# EAGLE board node (EAGLE 9.3.0)
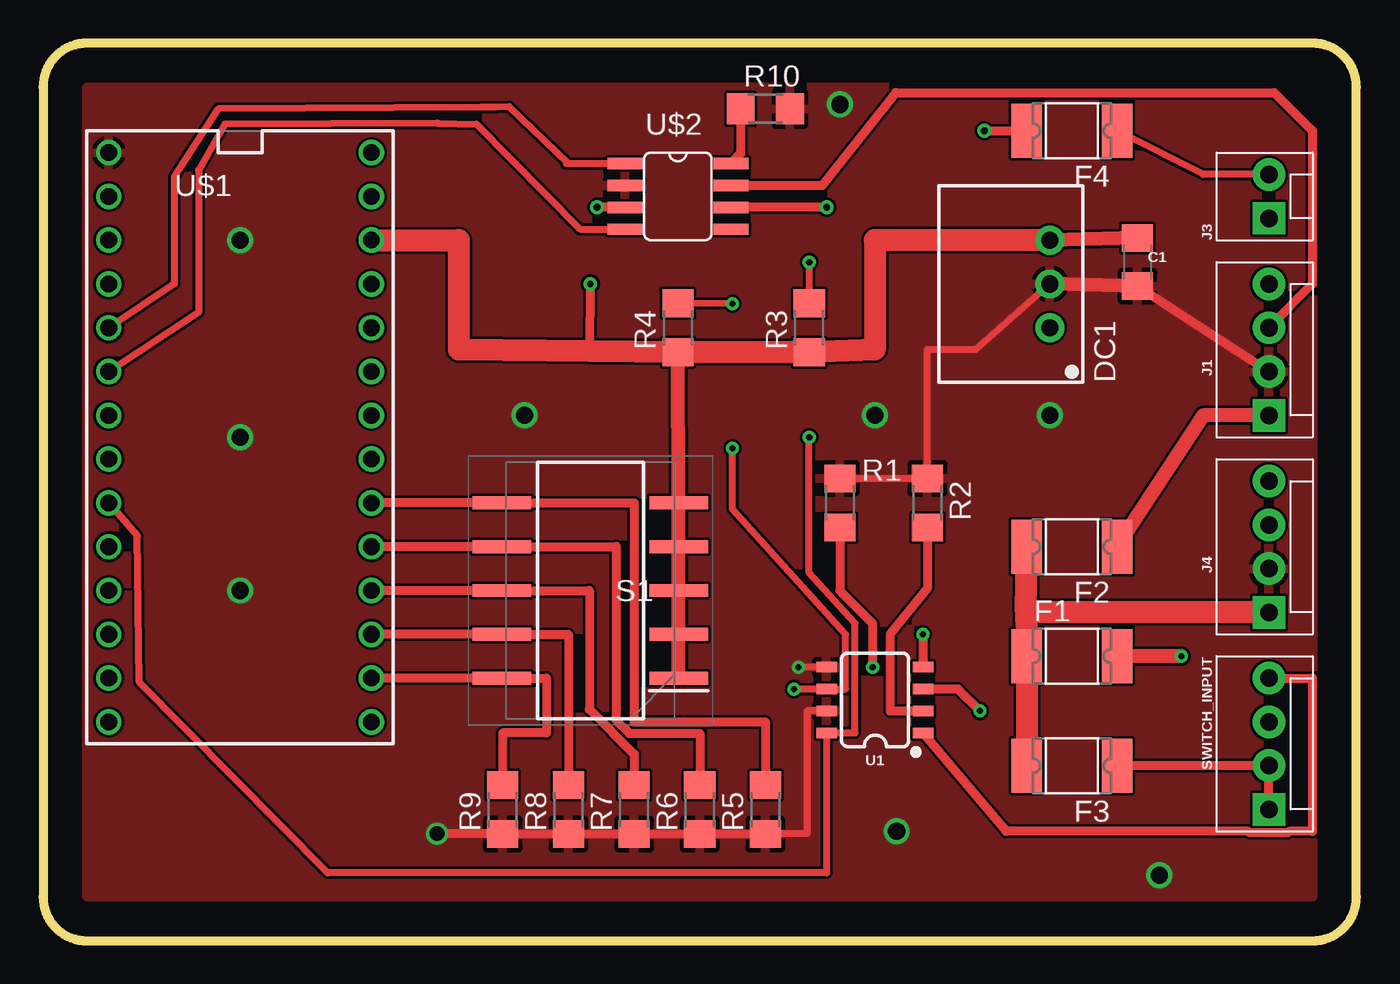
[diagram p0: board, top side]
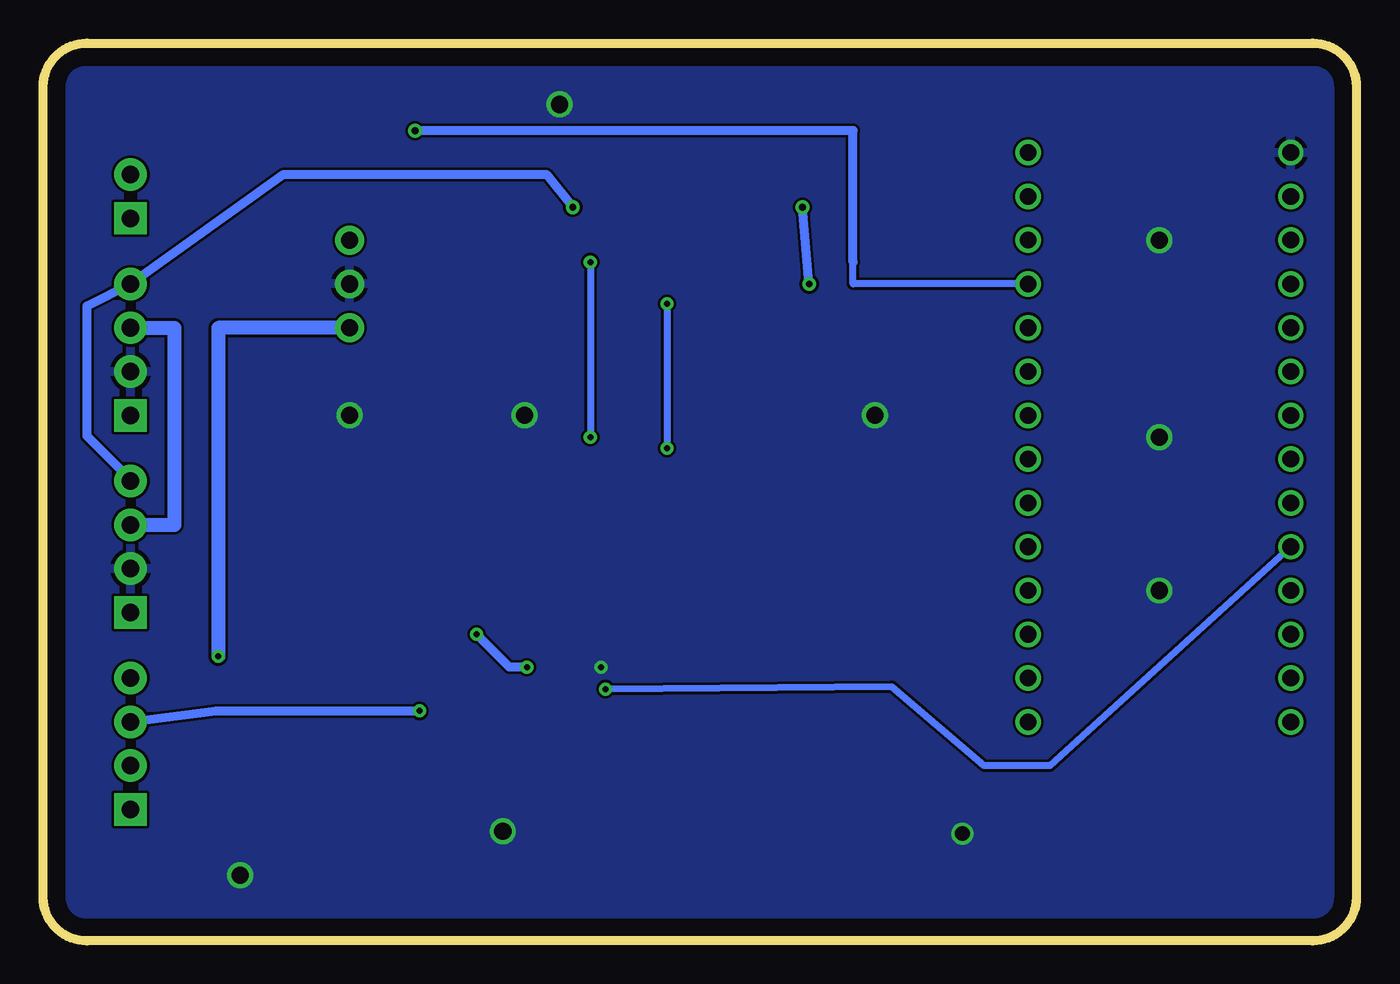
[diagram p1: board, bottom side, seen from below]

Size 76.2 x 52.07 mm. Coordinates in mm from the lower left corner, seen from the top.
Outline: 0,49.53 0,2.54 arc90 2.54,0 73.66,0 arc90 76.2,2.54 76.2,49.53 arc90 73.66,52.07 2.54,52.07 arc90 0,49.53
Copper layers (1*16): Top 0.035mm / dielectric 1.5mm / Bottom 0.035mm
Design rules "default": minimum track width 6mil, minimum drill 0.35mm, track to track 6mil, track to pad 6mil, pad to pad 6mil, via to via 6mil, smd to smd 6mil, copper to edge 40mil, drill to drill 6mil, minimum pad ring 10mil, minimum via ring 8mil, stop-mask expansion 4mil, vias tented up to drill 0mil, thermal gap 10mil

## Footprints (pad centres in the part's own frame; a part is rotated, then mirrored left to right if it is on the bottom)
1206 = smd 1.6 x 1.8: 1 -1.4,0; 2 1.4,0
SIP3 = drill 1 pad 1.676: 1 -2.54,0; 2 0,0; 3 2.54,0
1812L = smd 1.78 x 3.15: 1 -2.62,0; 2 2.62,0
MOLEX-1X4 = drill 1.016 pad 1.88 square: 1 0,0 | drill 1.016 pad 1.88: 2 2.54,0; 3 5.08,0; 4 7.62,0
MOLEX-1X2 = drill 1.016 pad 1.88 square: 1 0,0 | drill 1.016 pad 1.88: 2 2.54,0
R1206 = smd 1.6 x 1.803: 1 -1.422,0; 2 1.422,0
SOP254P1152X760-10N = smd 3.4 x 0.75: 1 -5.125,5.08; 2 -5.125,2.54; 3 -5.125,0; 4 -5.125,-2.54; 5 -5.125,-5.08; 6 5.125,-5.08; 7 5.125,-2.54; 8 5.125,0; 9 5.125,2.54; 10 5.125,5.08
SO08 = smd 0.6 x 1.2: 1 -1.905,-2.8; 2 -0.635,-2.8; 3 0.635,-2.8; 4 1.905,-2.8; 5 1.905,2.8; 6 0.635,2.8; 7 -0.635,2.8; 8 -1.905,2.8
TEENSY_3.0-3.2&LC_DIL = drill 0.965: 0 -7.62,13.97; 1 -7.62,11.43; 2 -7.62,8.89; 3 -7.62,6.35; 3.3V 7.62,11.43; 4 -7.62,3.81; 5 -7.62,1.27; 6 -7.62,-1.27; 7 -7.62,-3.81; 8 -7.62,-6.35; 9 -7.62,-8.89; 10 -7.62,-11.43; 11 -7.62,-13.97; 12 -7.62,-16.51; 13 7.62,-16.51; 14/A0 7.62,-13.97; 15/A1 7.62,-11.43; 16/A2 7.62,-8.89; 17/A3 7.62,-6.35; 18/A4 7.62,-3.81; 19/A5 7.62,-1.27; 20/A6 7.62,1.27; 21/A7 7.62,3.81; 22/A8 7.62,6.35; 23/A9 7.62,8.89; AGND 7.62,13.97; GND -7.62,16.51; VIN 7.62,16.51
SO8 = smd 0.66 x 2.032: 1 -1.905,-3.073; 2 -0.635,-3.073; 3 0.635,-3.073; 4 1.905,-3.073; 5 1.905,3.073; 6 0.635,3.073; 7 -0.635,3.073; 8 -1.905,3.073

## Placement (x,y rotation side)
C1  10uF  [1206]  63.5,39.37 270 top
DC1  R-78C1.8-1.0  [SIP3]  58.42,38.1 90 top
F1  1812L050  [1812L]  59.69,16.51 0 top
F2  1812L110/16  [1812L]  59.69,22.86 180 top
F3  1812L050  [1812L]  59.69,10.16 180 top
F4  1812L010  [1812L]  59.69,46.99 180 top
J1  [MOLEX-1X4]  71.12,30.48 90 top
J3  [MOLEX-1X2]  71.12,41.91 90 top
J4  [MOLEX-1X4]  71.12,19.05 90 top
R1  [R1206]  46.23,25.4 270 top
R2  [R1206]  51.31,25.4 270 top
R3  [R1206]  44.45,35.56 90 top
R4  [R1206]  36.83,35.56 90 top
R5  [R1206]  41.91,7.62 90 top
R6  [R1206]  38.1,7.62 90 top
R7  [R1206]  34.29,7.62 90 top
R8  [R1206]  30.48,7.62 90 top
R9  [R1206]  26.67,7.62 90 top
R10  [R1206]  41.91,48.26 0 top
S1  204-5ST  [SOP254P1152X760-10N]  31.75,20.32 180 top
SWITCH_INPUT  [MOLEX-1X4]  71.12,7.62 90 top
U1  DUAL-OPTOISOLATOR_SOIC8  [SO08]  48.26,13.97 90 top
U$1  TEENSY_3.0_DIL  [TEENSY_3.0-3.2&LC_DIL]  11.43,29.21 0 top
U$2  SN65HVD230/1  [SO8]  36.83,43.18 270 top

## Library data of the parts
C1 = SparkFun-Capacitors; PROD_ID: CAP-10057
DC1 = dc-dc-converter
F1 F3 = polyfuse-smd_10; MF: Littelfuse; MPN: 1812L050; OC_FARNELL: 1653478; OC_NEWARK: 18M4786
F2 = polyfuse-smd_10; MF: Littelfuse; MPN: 1812L110/16; OC_FARNELL: 1597004; OC_NEWARK: 05M2402
F4 = polyfuse-smd_10; MF: Littelfuse; MPN: 1812L010; OC_FARNELL: 1822210; OC_NEWARK: 78R5551
J1 J4 SWITCH_INPUT = SparkFun-Connectors; PROD_ID: CONN-08186; SF_ID: PRT-08231
J3 = SparkFun-Connectors; SF_ID: PRT-09918
R1-R10 = rcl; SPICEPREFIX: R
S1 = 204-5ST; DESCRIPTION: DIP Switches / SIP Switches SPST 5 switch sections; HEIGHT: 7.6mm; MANUFACTURER_NAME: CTS; MANUFACTURER_PART_NUMBER: 204-5ST
U1 = SparkFun-DiscreteSemi; PROD_ID: IC-09076
U$1 = Teensy_3_and_LC_Series_Boards_v1.4
U$2 = texas_instruments

## Nets
AGND: U$1.AGND
GND: C1.2 DC1.2 J1.2 J4.2 R1.1 R2.1 R5.1 R6.1 R7.1 R8.1 R9.1 R10.2 U1.5 U1.7 U$1.GND U$2.2
N$1: U$1.3 U$2.1
N$2: U$1.4 U$2.4
N$3: C1.1 DC1.3 R3.1 R4.1 S1.1 S1.2 S1.3 S1.4 S1.5 U$1.3.3V U$2.3
N$4: SWITCH_INPUT.3 U1.3
N$5: SWITCH_INPUT.4 U1.1
N$6: F4.1 J3.2
N$7: J1.3 J4.3 U$2.7
N$8: J1.4 J4.4 U$2.6
N$9: R9.2 S1.10 U$1.14/A0
N$10: R1.2 U1.4
N$11: R2.2 U1.2
N$12: R3.2 U1.8 U$1.7
N$13: R4.2 U1.6 U$1.8
N$14: F1.1 F2.2 F3.2 J4.1
N$15: F2.1 J1.1
N$16: F3.1 SWITCH_INPUT.1 SWITCH_INPUT.2
N$17: R8.2 S1.9 U$1.15/A1
N$18: R7.2 S1.8 U$1.16/A2
N$19: R6.2 S1.7 U$1.17/A3
N$20: R5.2 S1.6 U$1.18/A4
N$21: F4.2 U$1.23/A9
N$22: DC1.1 F1.2
N$23: R10.1 U$2.8
VIN: U$1.VIN

## Tracks (layer width: path | path; a pad name or v marks a point on that pad's centre or on a via)
GND  (via drill 0.35, 0.85, 1)
  Top 0.406: U1.7 44.32,13.34 44.32,6.22 R5.1 | R1.1 R2.1 51.31,34.29 54.1,34.29 DC1.2 | U1.5 v43.82,15.88
  Top 0.508: R5.1 R6.1 R7.1 R8.1 R9.1 v22.86,6.22 | J1.2 C1.2
  Top 0.813: C1.2 DC1.2
  other vias: 11.43,40.64 11.43,29.21 27.94,30.48 48.26,30.48 58.42,30.48 11.43,20.32 64.77,3.81 49.53,6.35 46.23,48.51
  pour Bottom: 1.27,1.27 1.27,50.8 74.93,50.8 74.93,1.27
  pour Top: 2.54,49.53 73.66,49.53 73.66,2.54 2.54,2.54
N$1
  Top 0.406: U$2.1 30.48,45.09 | 30.48,45.09 30.35,45.09 | 26.26,48.36 25.4,48.36 | U$1.3 7.62,38.1 7.62,44.32 10.16,48.26 25.4,48.36 | 30.48,45.09 27.05,48.39 25.4,48.36
N$2
  Top 0.406: U$2.4 31.16,41.28 25.15,47.37 22.87,47.42 | 22.91,47.42 22.86,47.42 22.87,47.42 | U$1.4 9.02,36.45 9.02,44.7 10.54,47.37 22.87,47.42
N$3  (via drill 0.4)
  Top 0.508: U$2.3 v32.13,42.55 | 31.75,34.2 v31.75,38.1
  Top 0.813: C1.1 DC1.3 | S1.1 S1.2 S1.3 S1.4 S1.5 R4.1
  Top 1.27: DC1.3 48.26,40.64 48.26,34.29 R3.1 R4.1 31.75,34.2 24.13,34.29 24.13,40.64 U$1.3.3V
  Bottom 0.508: v31.75,38.1 v32.13,42.55
N$4  (via drill 0.35)
  Top 0.508: v54.36,13.34 53.09,14.61 U1.3
  Bottom 0.508: SWITCH_INPUT.3 66.17,13.34 v54.36,13.34
N$5
  Top 0.508: SWITCH_INPUT.4 73.64,15.24 73.64,6.35 72.3,6.35 72.23,6.27 70.01,6.27 69.94,6.35 55.88,6.35 U1.1
N$6
  Top 0.406: J3.2 67.31,44.45 F4.1
N$7
  Top 0.508: U$2.7 45.21,43.82 49.47,49.2 71.43,49.2 73.64,46.99 73.64,38.1 J1.3
  Bottom 0.813: J4.3 68.58,24.13 68.58,35.56 J1.3
N$8  (via drill 0.4)
  Top 0.508: v45.47,42.55 U$2.6
  Bottom 0.508: v45.47,42.55 46.99,44.45 62.23,44.45 J1.4 73.64,36.83 73.64,29.28 71.12,26.76 J4.4
N$9
  Top 0.508: U$1.14/A0 S1.10 29.21,15.24 29.21,12.07 26.67,12.07 R9.2
N$10  (via drill 0.35)
  Top 0.508: R1.2 46.23,20.32 48.13,18.41 v48.13,15.88 | v51.05,17.78 v51.06,17.77 U1.4
  Bottom 0.508: v48.13,15.88 49.15,15.88 v51.05,17.78
N$11
  Top 0.508: R2.2 51.31,20.45 49.15,17.78 49.15,13.34 U1.2
N$12  (via drill 0.35)
  Top 0.406: v44.45,29.21 44.45,21.34 47.12,18.41 47.12,12.07 U1.8 45.47,3.94 16.51,3.94 5.59,14.99 5.46,23.49 U$1.7 | v44.45,39.37 R3.2
  Bottom 0.406: v44.45,39.37 v44.45,29.21
N$13  (via drill 0.35)
  Top 0.406: v40.01,28.57 40.01,25.02 46.56,17.78 46.56,14.61 U1.6 v43.56,14.61 | v40.01,36.96 R4.2
  Bottom 0.406: v40.01,36.96 v40.01,28.57 | U$1.8 17.78,10.16 21.59,10.16 26.95,14.74 v43.56,14.61
N$14
  Top 1.27: J4.1 57.02,19.05 | 57.02,19.05 F2.2 | 57.02,19.05 F1.1 F3.2
N$15
  Top 0.813: J1.1 67.31,30.48 F2.1
N$16
  Top 0.508: F3.1 SWITCH_INPUT.2 SWITCH_INPUT.1
N$17
  Top 0.508: U$1.15/A1 S1.9 30.48,17.78 R8.2
N$18
  Top 0.508: U$1.16/A2 S1.8 31.7,20.32 31.7,13.42 34.29,10.83 R7.2
N$19
  Top 0.508: U$1.17/A3 S1.7 33.25,22.86 33.25,12.81 34.02,12.04 38.1,12.04 R6.2
N$20
  Top 0.508: U$1.18/A4 S1.6 34.29,25.4 34.29,12.7 41.91,12.7 R5.2
N$21  (via drill 0.4)
  Top 0.508: v54.61,46.99 F4.2
  Bottom 0.406: U$1.23/A9 29.21,38.1 29.21,39.37
  Bottom 0.508: 29.21,39.37 29.21,46.99 v54.61,46.99
N$22  (via drill 0.35)
  Top 0.813: v66.04,16.51 F1.2
  Bottom 0.813: DC1.1 66.04,35.56 v66.04,16.51
N$23
  Top 0.508: U$2.8 40.49,45.67 R10.1